# Altium PCB RP2350_DevBoard.PcbDoc (part 1 of 2)
Units mil, origin at the board's own origin, x right, y up, seen from the top; angles counter-clockwise.
Board outline 3000 x 3600 mil, 2 copper layers (Top Layer, Bottom Layer), stack 33.512 mil thick; 69 components, 85 nets, 318 pads, 96 vias.
Unrouted connection lines stored in the file: 43.
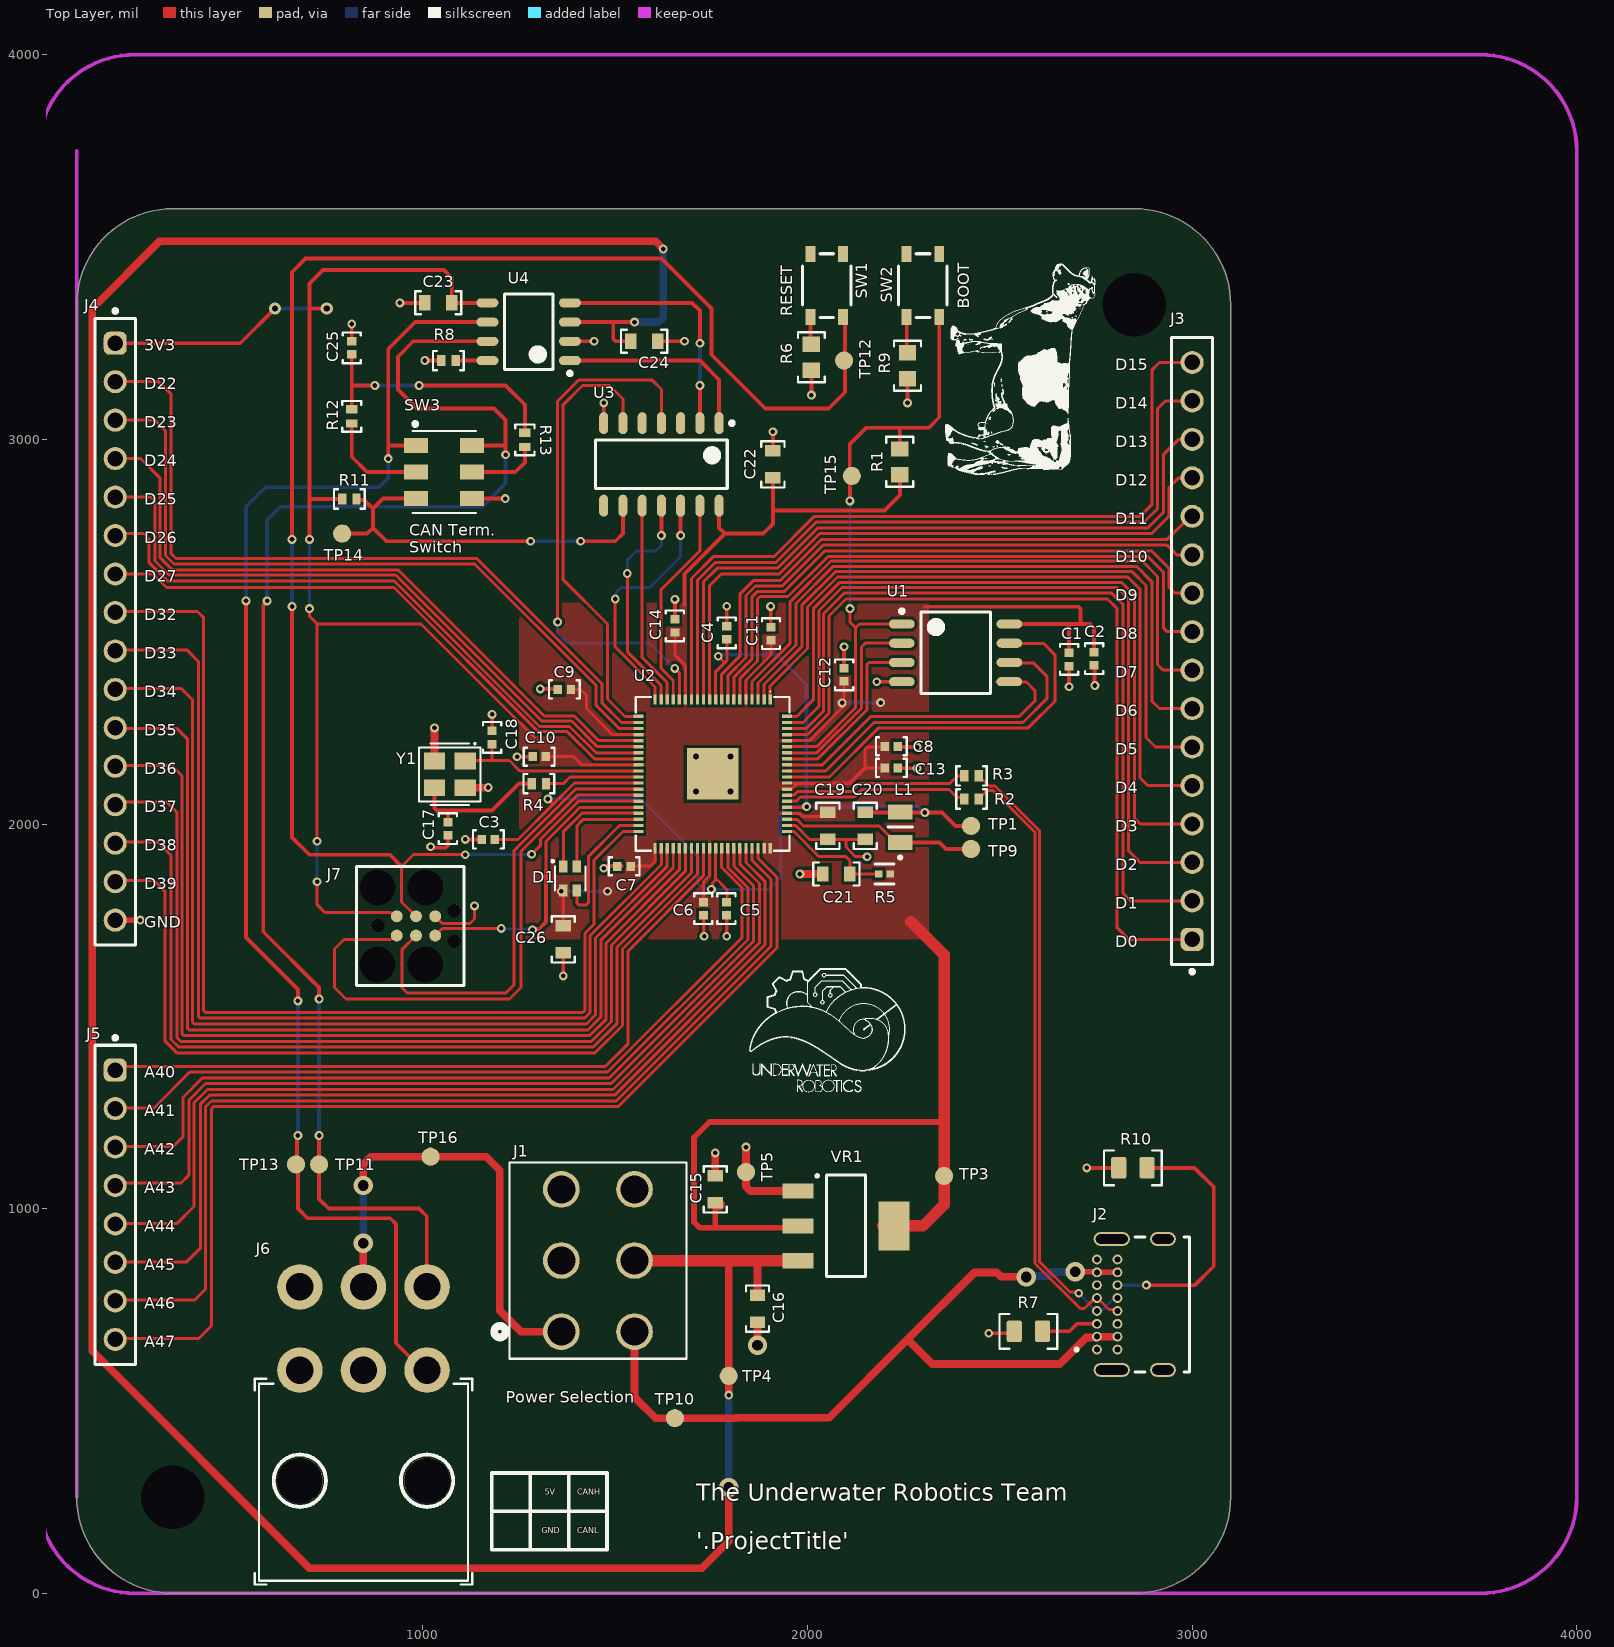
[diagram p0: Top Layer view]
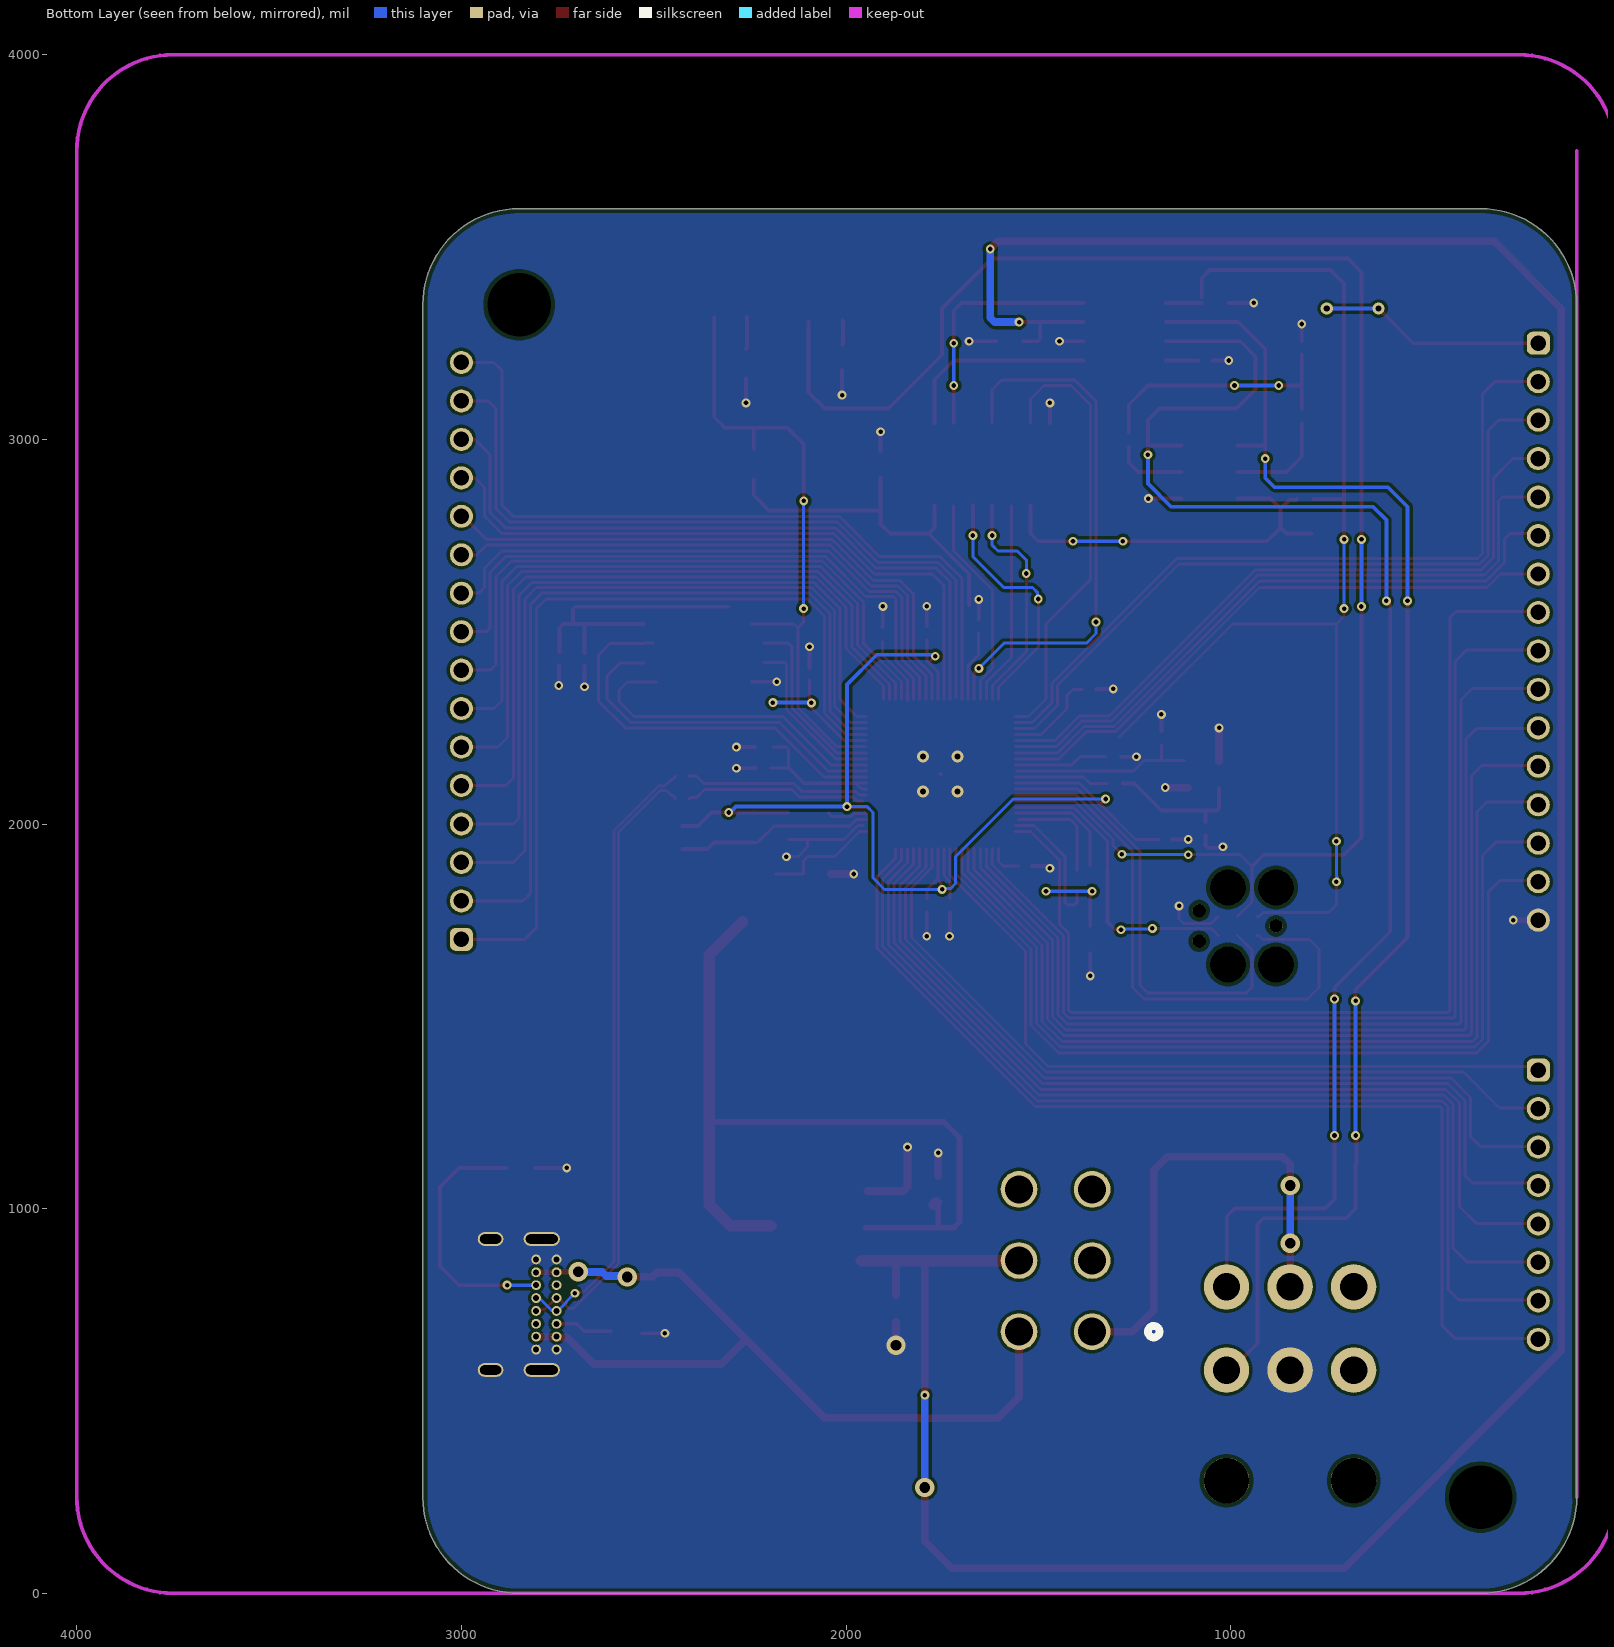
[diagram p1: Bottom Layer view, seen from below]
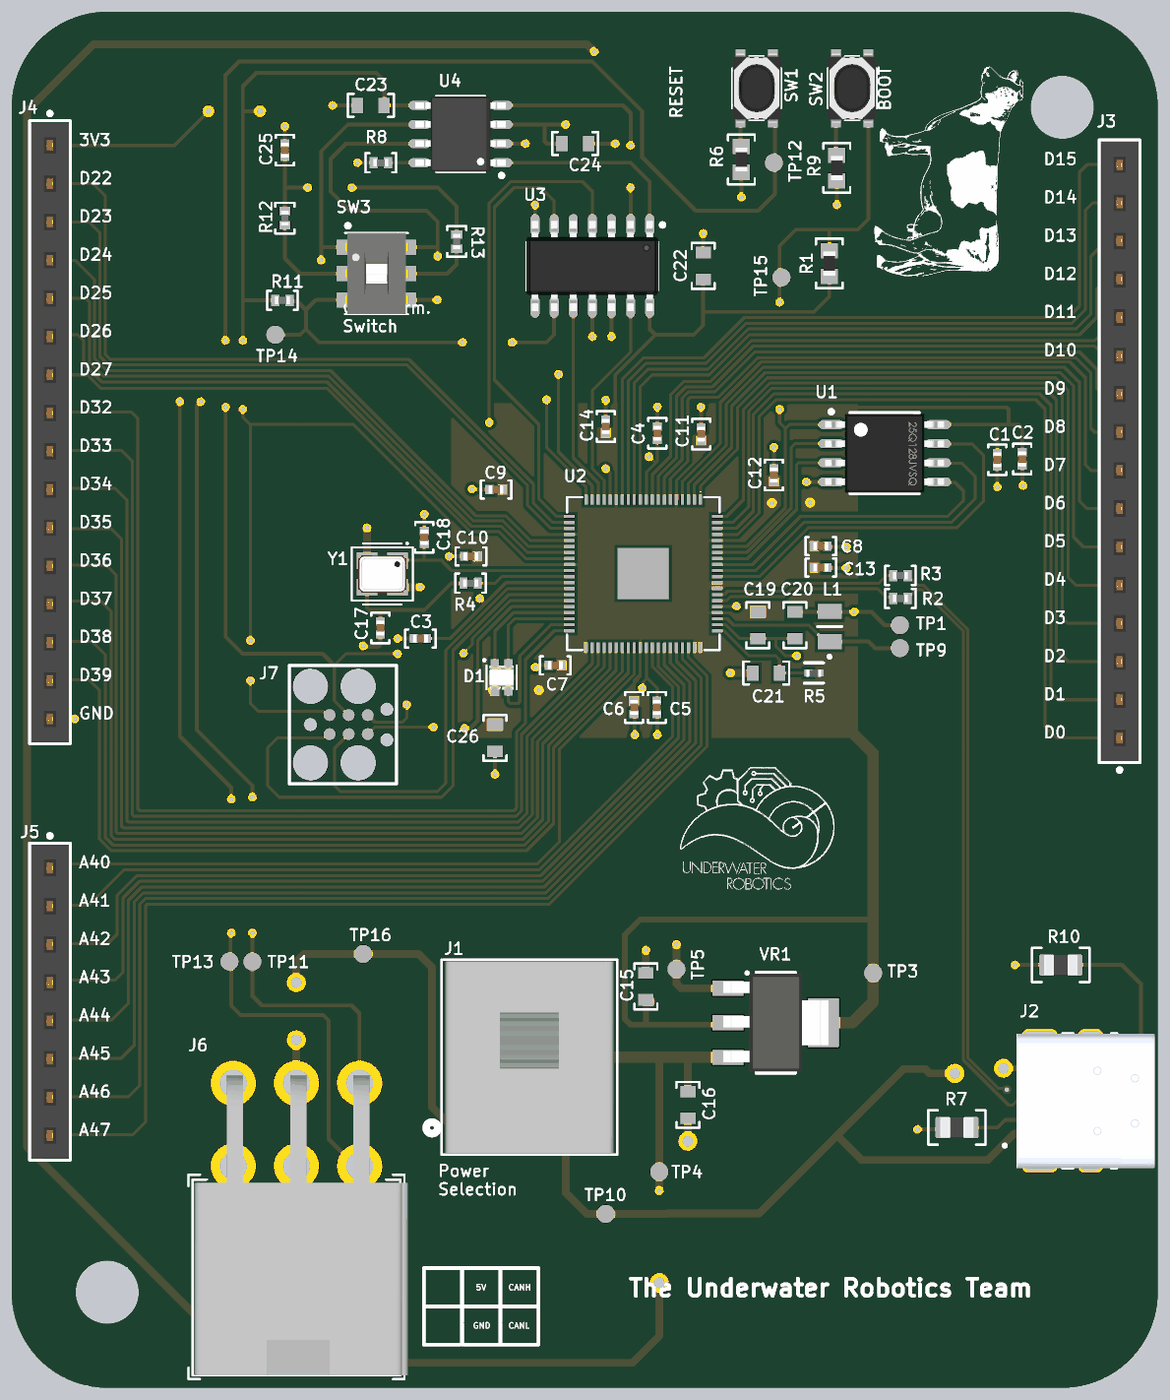
[diagram p2: 3D render of the assembled board from above, using the file's embedded part models]

## Layer stack, top to bottom
Top Solder: solder mask 1, SM-001, Dk 4
Top Layer: signal copper 2.7559
Dielectric 3: core 28, Core-039, Dk 4.8
Bottom Layer: signal copper 2.7559
Bottom Solder: solder mask 1, SM-001, Dk 4

## Board outline
350,3600 ccw(c350,3350) 100,3350 100,250 ccw(c350,250) 350,0 2850,0 ccw(c2850,250) 3100,250 3100,3350 ccw(c2850,3350) 2850,3600

## Design rules (kind name [scope] priority, off if disabled: settings)
AcuteAngle [All] p1: minimum=8.00000000000000E+0001 checktracksonly=FALSE
BoardOutlineClearance "BoardOutlineClearance JLCPCB" [All] p1: gap=11.81 ignorepadtopadclearanceinfootprint=FALSE
Clearance "Clearance JLCPCB 4 layer" [All] p1: gap=7.87 ignorepadtopadclearanceinfootprint=FALSE except(3.54: Arc-Arc Arc-Track Track-Track; 5: Arc-SMDPad Arc-Via Track-SMDPad Track-Via SMDPad-SMDPad; 9.45: THPad-THPad THPad-Via Via-Via; 10: Arc-Hole Track-Hole SMDPad-Hole THPad-Hole Via-Hole Fill-Hole Poly-Hole Region-Hole Text-Hole)
DiffPairsRouting "Diff Pairs USB 2.0" [InDifferentialPairClass('USB 2.0')] p1: maxlimit=5 minlimit=5 mostfreqgap=5 toplayer_minwidth=7.87 toplayer_maxwidth=7.87 toplayer_prefwidth=7.87 bottomlayer_minwidth=7.87 bottomlayer_maxwidth=7.87 bottomlayer_prefwidth=7.87 impedanceprofiledriven=TRUE impedanceprofileid={9C1C01C3-81FD-4AE1-9E3D-BC841176F5CA} maxuncoupledlength=500
DiffPairsRouting "Diff Pairs PCIe Gen 2" [InDifferentialPairClass('PCIe Gen 2')] p2: maxlimit=5 minlimit=5 mostfreqgap=5 toplayer_minwidth=5.53 toplayer_maxwidth=5.53 toplayer_prefwidth=5.53 bottomlayer_minwidth=5.53 bottomlayer_maxwidth=5.53 bottomlayer_prefwidth=5.53 impedanceprofiledriven=TRUE impedanceprofileid={D86E5A41-F98B-413D-93FD-A6E48D035561} maxuncoupledlength=500
HoleSize "HoleSize JLCPCB Pad" [IsPad] p1: absolutevalues=TRUE maxlimit=248.03 minlimit=19.68 maxpercent=80.000 minpercent=20.000
HoleSize "HoleSize JLCPCB 4 layer Cheap" [All] p2: absolutevalues=TRUE maxlimit=248.03 minlimit=11.81 maxpercent=80.000 minpercent=20.000
HoleToHoleClearance "HoleToHoleClearance JLCPCB Same Net" [All] p1: gap=10 allowstackedmicrovias=TRUE
MinimumAnnularRing "MinimumAnnularRing JLCPCB Via" [All] p1: minimumring=2.95
MinimumAnnularRing "MinimumAnnularRing JLCPCB Pad" [IsPad] p2: minimumring=9.84
MinimumAnnularRing "MinimumAnnularRing JLCPCB 1oz" [All] p3: minimumring=5.12
MinimumSolderMaskSliver "MinimumSolderMaskSliver JLCPCB" [All] p1: minsoldermaskwidth=3.94
PlaneClearance [All] p1: clearance=11.81
PlaneConnect [All] p1: planeconnectstyle=Direct reliefexpansion=20 reliefentries=4 reliefconductorwidth=10 reliefairgap=10
PolygonConnect [All] p1: connectstyle=Direct reliefconductorwidth=15 reliefentries=4 polygonreliefangle="45 Angle" airgapwidth=10
RoutingVias "RoutingVias JLCPCB 4 layer" [All] p1: holewidth=19.68 width=39.37 viastyle="Through Hole" minholewidth=11.81 minwidth=17.72 maxholewidth=50 maxwidth=80 useviatemplates=TRUE viatemplateguid#1={1FF1CE2E-D4DA-45DD-BA18-462DD51CCE8B} viatemplateguid#2={A26B80D9-3972-439C-BF20-AF114F6C39ED} viatemplateguid#3={94EF3918-7136-44E3-8D4D-2DFBB820EAE1} viatemplatename#1=v50h30m0mx0(Tol13-8) viatemplatename#2=v65h40m0mx0(Tol13-8) viatemplatename#3=v80h50m0mx0(Tol13-8)
SilkToSilkClearance [All] p1: silktosilkclearance=3
SilkToSolderMaskClearance "SilkToSolderMaskClearance JLCPCB" [IsPad] p1: minsilkscreentomaskgap=5.91 clearancetoexposedcopper=TRUE
SolderMaskExpansion "SolderMaskExpansion JLCPCB" [All] p1: expansion=1.5 istentingtop=FALSE
UnRoutedNet [All] p1: checkbadconnections=TRUE
Width "Width JLCPCB 4 layer" [All] p1: maxlimit=196.85 minlimit=3.54 preferedwidth=9.84 minimp=50.000000 maximp=50.000000 favimp=50.000000
21 further rules are at their usual default settings.

## Classes and differential pairs
component class Micro: C1 C2 C3 C4 C5 C6 C7 C8 C9 C10 C11 C12 C13 C14 C15 C16 C17 C18 C19 C20 C21 J1 L1 R1 R2 R3 R4 R5 TP1 TP3 TP4 TP5 TP9 U1 U2 VR1 Y1
component class Connectors: C22 C23 C24 C25 C26 D1 J2 J3 J4 J5 J6 J7 R6 R7 R8 R9 R10 R11 R12 R13 SW1 SW2 SW3 TP10 TP11 TP12 TP13 TP14 TP15 TP16 U3 U4
differential pair USB_D: +USB_D_P -USB_D_N

## Components (designator, comment, footprint, x,y, rotation, side; value= is the part's Value field where it differs from the comment)
C1 "100nF Ceramic 25V" CAPACITOR_0402 2680,2427.87 r270 top value=0.1uF
C2 "100nF Ceramic 25V" CAPACITOR_0402 2745,2430 r270 top value=0.1uF
C3 "100nF Ceramic 25V" CAPACITOR_0402 1170,1960 r180 top value=0.1uF
C4 "4700pF Ceramic 25V" CAPACITOR_0402 1790,2497.13 r90 top value=4.7nF
C5 "100nF Ceramic 25V" CAPACITOR_0402 1789,1779.87 r270 top value=0.1uF
C6 "100nF Ceramic 25V" CAPACITOR_0402 1729,1779.87 r270 top value=0.1uF
C7 "100nF Ceramic 25V" CAPACITOR_0402 1522.87,1890 r180 top value=0.1uF
C8 "100nF Ceramic 25V" CAPACITOR_0402 2217.87,2202 r0 top value=0.1uF
C9 "100nF Ceramic 25V" CAPACITOR_0402 1367.87,2350 r180 top value=0.1uF
C10 "100nF Ceramic 25V" CAPACITOR_0402 1302.13,2175 r180 top value=0.1uF
C11 "100nF Ceramic 25V" CAPACITOR_0402 1905,2495 r90 top value=0.1uF
C12 "100nF Ceramic 25V" CAPACITOR_0402 2095,2387.87 r90 top value=0.1uF
C13 "100nF Ceramic 25V" CAPACITOR_0402 2218,2146 r0 top value=0.1uF
C14 "100nF Ceramic 25V" CAPACITOR_0402 1655,2515 r90 top value=0.1uF
C15 "10uF Ceramic 6.3V" CAPACITOR_0603 1760,1050 r90 top
C16 "10uF Ceramic 6.3V" CAPACITOR_0603 1870,740 r270 top
C17 "15pF Ceramic 50V" CAPACITOR_0402 1065,1987.87 r270 top value=15pF
C18 "15pF Ceramic 50V" CAPACITOR_0402 1180,2225 r90 top value=15pF
C19 "4.7uF Ceramic 6.3V" CAPACITOR_0603 2053,1995 r270 top value=4.7uF
C20 "4.7uF Ceramic 6.3V" CAPACITOR_0603 2150,1995 r90 top value=4.7uF
C21 "4.7uF Ceramic 6.3V" CAPACITOR_0603 2075,1870 r180 top value=4.7uF
C22 "100nF Ceramic 25V" CAPACITOR_0603 1910,2935 r90 top value=0.1uF
C23 "100nF Ceramic 25V" CAPACITOR_0603 1040,3355 r180 top value=0.1uF
C24 "100nF Ceramic 25V" CAPACITOR_0603 1575,3255 r0 top value=0.1uF
C25 "4700pF Ceramic 25V" CAPACITOR_0402 815,3237.87 r90 top value=4.7nF
C26 "1uF Ceramic 16V" CAPACITOR_0603 1365,1700 r270 top value=1uF
D1 "EAST1616RGBB4" LED_0606_4SMD 1382.28,1858.5 r270 top
J1 "Slide Switch 6A 28V DPDT Through Hole" CONN_S3CQE2 1360,680 r0 top
J2 "USB-C TH" "USB-C TH" 2752.42,633.6 r90 top
J3 "61301611821" 61301611821 3000,2450 r90 top
J4 "61301611821" 61301611821 200,2500 r270 top
J5 "61300811821" 61300811821 200,1010 r270 top
J6 "Mini-Fit Jr R/A" "CONN_MOLEX_MINIFIT JR_6 POS_R/A" 680,292.6 r0 top
J7 "TagConnect SWD" TC2030-MCP 882,1735 r0 top
L1 "3.3 uH Shielded" INDUCTOR_0806 2241,1952.26 r90 top value="3.3 uH"
R1 "10k Ohm 0.5% 1/10W" RESISTOR_0603 2240,2941.5 r90 top
R2 "27 Ohm 1% 1/16W" RESISTOR_0402 2426.3,2065 r0 top
R3 "27 Ohm 1% 1/16W" RESISTOR_0402 2426.3,2125 r0 top
R4 "1k Ohm 1% 1/16W" RESISTOR_0402 1301.3,2105 r180 top
R5 "AC0402JR-0733RL" FP-AC0402-IPC_C 2199.9,1870 r180 top
R6 "1k Ohm 5% 1/8W" RESISTOR_0603 2010,3213.5 r270 top
R7 "5.1k Ohm 1% 1/8W" RESISTOR_0805 2574.19,681 r0 top
R8 "10k Ohm 1% 1/16W" RESISTOR_0402 1066.3,3205 r180 top
R9 "1k Ohm 5% 1/8W" RESISTOR_0603 2260,3191.5 r270 top
R10 "5.1k Ohm 1% 1/8W" RESISTOR_0805 2846,1106 r0 top
R11 "10k Ohm 1% 1/16W" RESISTOR_0402 808.7,2845 r0 top
R12 "60.4 Ohm 1% 1/16W" RESISTOR_0402 815,3060 r90 top
R13 "60.4 Ohm 1% 1/16W" RESISTOR_0402 1265,2998.7 r90 top
SW1 "434123025826" SMD_434123025826 2050,3400 r270 top
SW2 "434123025826" SMD_434123025826 2300,3400 r270 top
SW3 "Switch DPDT" CAS-220TA 1055,2915 r270 top
TP1 "PCB Test Point" TESTPOINT_1.2MM 2425,1995 r0 top
TP3 "PCB Test Point" TESTPOINT_1.2MM 2355,1085 r90 top
TP4 "PCB Test Point" TESTPOINT_1.2MM 1795,565 r0 top
TP5 "PCB Test Point" TESTPOINT_1.2MM 1840,1095 r0 top
TP9 "PCB Test Point" TESTPOINT_1.2MM 2425,1935 r0 top
TP10 "PCB Test Point" TESTPOINT_1.2MM 1655,455 r0 top
TP11 "PCB Test Point" TESTPOINT_1.2MM 730,1115 r0 top
TP12 "PCB Test Point" TESTPOINT_1.2MM 2095,3205 r0 top
TP13 "PCB Test Point" TESTPOINT_1.2MM 670,1115 r0 top
TP14 "PCB Test Point" TESTPOINT_1.2MM 790,2755 r0 top
TP15 "PCB Test Point" TESTPOINT_1.2MM 2115,2905 r0 top
TP16 "PCB Test Point" TESTPOINT_1.2MM 1020,1135 r0 top
U1 "W25Q128JVSIQ" "SOIC-8 W25QxJV" 2385,2445 r0 top
U2 "RP2350B" QFN-80 1902.82,2323.33 r270 top
U3 "MCP2517FD" SOIC-14 1620,2935 r270 top
U4 "CAN Transceiver" SOIC-8 1275,3280 r180 top
VR1 "LM1117IMPX-3.3/NOPB" SOT-223-4 2100,955 r0 top
Y1 "CRYSTAL 10PF SMD" "4-SMD, NO LEAD CRYSTAL 3.2x2.5mm" 1110,2164 r180 top value="12 MHz"

## Footprints (in the part's own frame and the unit in brackets; to place one, negate y for a bottom-side part, rotate by r counter-clockwise, add the part's x,y. Pads: shape width x height; smd on the part's side, far side on the other; paste and mask are expansions set on the pad)
"4-SMD, NO LEAD CRYSTAL 3.2x2.5mm" [mm]
  rrect0% 1.4x1.1 smd: 1(0,0) 2(2.032,0) 3(2.032,1.778) 4(0,1.778)
  silkscreen extent -1.02,-1.2 3.05,2.92, body extent -0.58,-0.36 2.62,2.14, height 0.82
61300811821 [mm] "Socket Header, Pitch 2.54 mm, THT, Vertical, single row, 8p"
  rrect50% 1.52x1.52 hole 1.02: 1(-8.89,0)
  round 1.52 hole 1.02: 2(-6.35,0) 3(-3.81,0) 4(-1.27,0) 5(1.27,0) 6(3.81,0) 7(6.35,0) 8(8.89,0)
  silkscreen extent -11.14,-1.35 10.54,1.35, body extent -10.41,-1.25 10.41,1.25, height 8.55
61301611821 [mm] "Socket Header, Pitch 2.54 mm, THT, Vertical, single row, 16p"
  rrect50% 1.52x1.52 hole 1.02: 1(-19.05,0)
  round 1.52 hole 1.02: 2(-16.51,0) 3(-13.97,0) 4(-11.43,0) 5(-8.89,0) 6(-6.35,0) 7(-3.81,0) 8(-1.27,0) 9(1.27,0) 10(3.81,0) 11(6.35,0) 12(8.89,0) 13(11.43,0) 14(13.97,0) 15(16.51,0) 16(19.05,0)
  silkscreen extent -21.3,-1.35 20.7,1.35, body extent -20.57,-1.25 20.57,1.25, height 8.55
CAPACITOR_0402 [mm]
  rect 0.56x0.6 smd: 1(-0.435,0) 2(0.435,0)
  silkscreen extent -1.02,-0.6 1.02,0.6, body extent -0.5,-0.28 0.5,0.27, height 0.51
CAPACITOR_0603 [mil] "CAPACITOR 0603"
  rect 30x40 smd: 1(-35,0) 2(35,0)
  silkscreen extent -60,-30 60,30, body extent -31,-16 32,16, height 31
CAS-220TA [mm] "SWITCH SLIDE DPDT 100MA 6V"
  rrect0% 1x1.6 smd: 1(-1.75,-1.85) 2(0,-1.85) 3(1.75,-1.85) 4(-1.75,1.85) 5(0,1.85) 6(1.75,1.85)
  silkscreen extent -3.3,-2.1 2.7,2.1, body extent -2.7,-2.1 2.7,2.1, height 2.51
"CONN_MOLEX_MINIFIT JR_6 POS_R/A" [mm] "Molex Minifit Jr 5569 6 Pos R/A"
  round 3 hole 1.801: 1(8.4,7.3) 4(8.4,12.8)
  round 3 hole 1.8: 2(4.2,7.3) 3(0,7.3) 5(4.2,12.8) 6(0,12.8)
  round 3 hole 3 unplated mask+0: ""(0,0) ""(8.4,0)
  silkscreen extent -2.98,-6.86 11.38,6.73, body extent -2.58,-6.6 11.62,13.33, height 11.4
CONN_S3CQE2 [mm]
  round 2.424 hole 1.85 mask+0: 1(4.83,0) 2(4.83,4.7) 3(4.83,9.4) 4(0,0) 5(0,4.7) 6(0,9.4)
  silkscreen extent -4.44,-1.78 8.26,11.18, body extent -3.29,-1.65 8.12,11.05, height 11.2
FP-AC0402-IPC_C [mil]
  rect 20.29x18.6 smd paste+0 mask+0: 1(-14.9,0) 2(14.9,0)
  silkscreen extent -25,-27 25,27, body extent -29,-15 29,15, height 10
INDUCTOR_0806 [mm]
  rect 1x1.6 smd: 1(0,0) 2(2,0)
  silkscreen extent -1.1,-0.8 1,0.8
LED_0606_4SMD [mm]
  rrect0% 0.8x0.55 smd: 1(-0.8,-0.45) 2(-0.8,0.45) 3(0.8,0.45) 4(0.8,-0.45)
  silkscreen extent -1.22,-1.22 0.8,1.02, body extent -0.8,-0.8 0.8,0.8, height 0.35
QFN-80 [mm]
  rect 0.665x0.22 smd: 1(0,0) 2(0,-0.4) 3(0,-0.8) 4(0,-1.2) 5(0,-1.6) 6(0,-2) 7(0,-2.4) 8(0,-2.8) 9(0,-3.2) 10(0,-3.6) 11(0,-4) 12(0,-4.4) 13(0,-4.8) 14(0,-5.2) 15(0,-5.6) 16(0,-6) 17(0,-6.4) 18(0,-6.8) 19(0,-7.2) 20(0,-7.6) 41(9.815,-7.6) 42(9.815,-7.2) 43(9.815,-6.8) 44(9.815,-6.4) 45(9.815,-6) 46(9.815,-5.6) 47(9.815,-5.2) 48(9.815,-4.8) 49(9.815,-4.4) 50(9.815,-4) 51(9.815,-3.6) 52(9.815,-3.2) 53(9.815,-2.8) 54(9.815,-2.4) 55(9.815,-2) 56(9.815,-1.6) 57(9.815,-1.2) 58(9.815,-0.8) 59(9.815,-0.4) 60(9.815,0)
  rect 0.22x0.665 smd: 21(1.107,-8.708) 22(1.507,-8.708) 23(1.908,-8.708) 24(2.308,-8.708) 25(2.708,-8.708) 26(3.107,-8.708) 27(3.507,-8.708) 28(3.908,-8.708) 29(4.308,-8.708) 30(4.708,-8.708) 31(5.107,-8.708) 32(5.507,-8.708) 33(5.908,-8.708) 34(6.308,-8.708) 35(6.708,-8.708) 36(7.107,-8.708) 37(7.507,-8.708) 38(7.908,-8.708) 39(8.308,-8.708) 40(8.708,-8.708) 61(8.708,1.107) 62(8.308,1.107) 63(7.908,1.107) 64(7.507,1.107) 65(7.107,1.107) 66(6.708,1.107) 67(6.308,1.107) 68(5.908,1.107) 69(5.507,1.107) 70(5.107,1.107) 71(4.708,1.107) 72(4.308,1.107) 73(3.908,1.107) 74(3.507,1.107) 75(3.107,1.107) 76(2.708,1.107) 77(2.308,1.107) 78(1.908,1.107) 79(1.507,1.107) 80(1.107,1.107)
  rect 3.4x3.4 smd: 81(4.908,-3.8)
  silkscreen extent -0.56,-8.88 9.98,1.28
RESISTOR_0402 [mm] "Resistor 0402"
  rect 0.55x0.75 smd: 1(-0.475,0) 2(0.475,0)
  silkscreen extent -1.02,-0.64 1.02,0.64, body extent -0.5,-0.25 0.5,0.25, height 0.25
RESISTOR_0603 [mil] "Resistor 0603"
  rect 40x45 smd: 1(-33.5,0) 2(33.5,0)
  silkscreen extent -65,-35 65,35, body extent -31,-16 32,16, height 16
RESISTOR_0805 [mm]
  rrect25% 1x1.42 smd: 1(-0.935,0) 2(0.935,0)
  silkscreen extent -1.91,-1.14 1.91,1.14, body extent -1.11,-0.67 1.1,0.67, height 0.61
SMD_434123025826 [mm]
  rect 1.05x0.65 smd: A1(-2.075,1.075) A2(2.075,1.075) B1(-2.075,-1.075) B2(2.075,-1.075)
  silkscreen extent -2.1,-1.6 2.1,1.6, body extent -2.3,-1.6 2.3,1.6, height 2.5
SOIC-8 [mm] "SOIC, 8-Leads, Body 4.90x3.90mm, Pitch 1.27mm, IPC Medium Density"
  oval 1.45x0.6 smd: 1(-2.725,1.905) 2(-2.725,0.635) 3(-2.725,-0.635) 4(-2.725,-1.905) 5(2.725,-1.905) 6(2.725,-0.635) 7(2.725,0.635) 8(2.725,1.905)
  silkscreen extent -2.85,-2.5 1.6,2.88, body extent -3,-2.5 3,2.5, height 1.75
"SOIC-8 W25QxJV" [mm] "SOIC, 8-Leads, Body 5.28x5.28mm, Pitch 1.27mm, IPC Medium Density"
  oval 1.7x0.6 smd: 1(-3.55,1.905) 2(-3.55,0.635) 3(-3.55,-0.635) 4(-3.55,-1.905) 5(3.55,-1.905) 6(3.55,-0.635) 7(3.55,0.635) 8(3.55,1.905)
  silkscreen extent -3.67,-2.7 2.3,2.88, body extent -3.95,-2.62 3.95,2.62, height 1.95
SOIC-14 [mm] "SOIC, 14-Leads, Body 8.65x3.90mm, Pitch 1.27mm, IPC Medium Density"
  oval 1.45x0.6 smd: 1(-2.725,3.81) 2(-2.725,2.54) 3(-2.725,1.27) 4(-2.725,0) 5(-2.725,-1.27) 6(-2.725,-2.54) 7(-2.725,-3.81) 8(2.725,-3.81) 9(2.725,-2.54) 10(2.725,-1.27) 11(2.725,0) 12(2.725,1.27) 13(2.725,2.54) 14(2.725,3.81)
  silkscreen extent -2.85,-4.35 1.6,4.79, body extent -3,-4.4 3,4.4, height 1.7
SOT-223-4 [mm]
  rect 2.05x1 smd paste+0 mask+0.102: 1(-3.175,2.3) 2(-3.175,0) 3(-3.175,-2.3)
  rect 2.05x3.25 smd paste+0 mask+0.102: 4(3.175,0)
  silkscreen extent -1.96,-3.35 1.3,3.35, body extent -3.5,-3.25 3.5,3.25, height 1.68
TC2030-MCP [mil]
  round 31 smd: 1(50,-25) 2(50,25) 3(100,-25) 4(100,25) 5(150,-25) 6(150,25)
  round 34 hole 35 unplated: A(0,0) B(200,40) C(200,-40)
  round 92 hole 93 unplated: D(0,-100) E(125,-100) F(0,100) G(125,100)
  silkscreen extent -55,-155 225,155
TESTPOINT_1.2MM [mm]
  round 1.2 smd: TP(0,0)
"USB-C TH" [mm]
  round 0.65 hole 0.4: A1(0,0) A4(0.85,0) A5(1.7,0) A6(2.55,0) A7(3.4,0) A8(4.25,0) A9(5.1,0) A12(5.95,0) B1(5.95,-1.35) B4(5.1,-1.35) B5(4.25,-1.35) B6(3.4,-1.35) B7(2.55,-1.35) B8(1.7,-1.35) B9(0.85,-1.35) B12(0,-1.35)
  oval 0.9x1.7 hole 0.6 slot 1.4 at 90 deg: S1(-1.35,-4.36) S2(7.3,-4.36)
  oval 0.9x2.4 hole 0.6 slot 2.1 at 90 deg: S3(-1.35,-0.98) S4(7.3,-0.98)
  silkscreen extent -1.5,-6.1 7.45,1.44, body extent -1.5,-8.61 7.45,0.56, height 3.46

## Part data
C1 C2 C3 C5 C6 C7 C8 C9 C10 C11 C12 C13 C14: library part CAPACITOR_0.1uF_0402, "Cap 100nF 25V +/-10% / Ceramic 0402", Supplier Part Number 1=7029569, Tolerance="+/- 10%", Voltage=25V, Made By="Robert Pafford", Supplier 1="Future Electronics"
C4 C25: library part CAPACITOR_0.0047uF_0402, "4700 pF +/-10% 25V Ceramic Capacitor X7R 0402", Supplier Part Number 1=1909415, Tolerance="+/- 10%", Voltage=25V, Made By="Robert Pafford", Supplier 1="Future Electronics"
C15 C16: library part CAPACITOR_10uF_0603, "Cap 10uF 6.3V +/-20% / Ceramic 0603", Supplier Part Number 1=1276-1119-1-ND, Tolerance="+/- 20%", Value (uF)="10 uF", Voltage=6.3V, ComponentLink1Description=Digikey, ComponentLink1URL=https://www.digikey.com/en/products/detail/samsung-electro-mechanics/CL10A106MQ8NNNC/3886777, Made By="Flip B", Supplier 1=Digi-Key
C17 C18: library part CAPACITOR_0.000015uF_0402, "CAP CER 15PF 50V C0G/NP0 0402", Supplier Part Number 1=82AC9245, Tolerance="+/- 5%", Voltage=50V, Made By="Robert Pafford", Supplier 1=Newark
C19 C20 C21: library part CAPACITOR_4.7uF_0603, "Cap 4.7uF 6.3V +/-10% / Ceramic 0603", Supplier Part Number 1=1276-2087-1-ND, Tolerance="+/- 10%", Voltage=6.3V, Made By="Robert Pafford", Supplier 1=Digi-Key
C22 C23 C24: library part CAPACITOR_0.1uF_0603_25V, "Cap 100nF 25V +/-10% / Ceramic 0603", Supplier Part Number 1=1276-1006-1-ND, Tolerance="+/- 10%", Voltage=6.3V, ComponentLink1Description=Datsheet, ComponentLink1URL=https://www.mouser.com/datasheet/2/212/KEM_C1002_X7R_SMD-1102033.pdf, Made By="Flip B", Supplier 1=Digikey
C26: library part CAPACITOR_1uF_0603, "Cap 1uF 16V +/-10% / Ceramic 0603", Supplier Part Number 1=C1608X7R1C105K080AC, Tolerance="+/- 10%", Voltage=16V, Made By="Flip B", Supplier 1="Arrow Electronics"
D1: library part LED_RGB_4SMD, "LED RGB CLEAR 4SMD", Blue Forward Current=5mA, Blue Forward Voltage=2.8V, Color=RGB, Package=4-SMD, Red Forward Voltage=1.8V, Supplier Part Number 1=1080-1552-1-ND, ComponentLink1Description=Datasheet, ComponentLink1URL=https://everlightamericas.com/index.php?controller=attachment&id_attachment=3220, Green Forward Current=5mA, Green Forward Voltage=2.8V, Made By="Robert Pafford", Red Forward Current=5mA, Supplier 1=Digi-Key
J1: library part "Slide DPDT Switch", "SWITCH SLIDE DPDT 6A 28V Through Hole", Manufacturer_Part_Number=1201M2S3CQE2, Mfr_Name=C&K, Supplier Part Number 1=36AH1005, Copyright="Copyright (C) 2022 Ultra Librarian. All rights reserved.", RefDes=RefDes, Supplier 1=Newark, Type=DEV
J2: library part CONN_USBC_USB4085-GF-A, "USB-C (USB TYPE-C) USB 2.0 Receptacle Connector 24 (16+8 Dummy) Position Through Hole, Right Angle", Supplier Part Number 1=2073-USB4085-GF-ADKR-ND, Created By="John Ulm", Interface=USB-C, Supplier 1=DigiKey, Type="Through Hole"
J3 J4: library part CMP-1502-01343-3, Contact Resistance=20mΩ, Current Rating=3A, Operating Supply Voltage=250V, Contact Material=Copper, Gender=Female, Lead Free="Lead Free", Lead Pitch=2.54mm, NexarPartId=23389750, Number of Pins=16, Orientation=Vertical, RoHS=Compliant
J5: library part CMP-1502-01327-3, Contact Resistance=20mΩ, Current Rating=3A, Operating Supply Voltage=250V, Gender=Female, Lead Pitch=2.54mm, NexarPartId=61924723, Number of Pins=8, Orientation=Vertical, RoHS=Non-Compliant
J6: library part "CONN_MOLEX_MINIFIT JR_6POS_R/A", "Molex Minifit Jr. 5569  / 6 Pos R/A Natural", Color=Natural, Current Per Pin=13A, Manufacturer=Molex, Supplier Part Number 1=WM1353-ND, ComponentLink1Description=Datasheet, ComponentLink1URL=https://www.molex.com/pdm_docs/ps/PS-5556-001.pdf, Configuration="Right Angle", Created By="Flip B", Number of Positions=8, Pitch=4.2mm, Series="Minifit Jr 5569", Supplier 1=Digi-Key
J7: library part TC2030_SWD, "TagConnect TC2030 ARM SWD 6-pin"
L1: library part INDUCTOR_3.3uH_0806, "3.3 µH Shielded Molded Inductor 2.1 A 140mOhm Max 0806 (2016 Metric)", Manufacturer="Abracon LLC", Supplier Part Number 1=535-AOTA-B201610S3R3-101-TDKR-ND, Created By="John Ulm", Supplier 1=DigiKey
R1: library part RESISTOR_10K_0.5%_0603, "RES 10k OHM 0.5% 1/10W 0603", Digikey Part Numer=CR0603-JW-104ELFTR-ND, Supplier Part Number 1=749-1695-1-ND, Tolerance="+/- 0.5%", Value  (Ohms)=10K, Made By="Robert Pafford", Supplier=Digikey, Supplier 1=Digi-Key, Wattage=1/10W
R2 R3: library part RESISTOR_27_0402, "RES 27 OHM 1% 1/16W 0402", Digikey Part Numer=CR0603-JW-104ELFTR-ND, Supplier Part Number 1=YAG5278DKR-ND, Tolerance="+/- 1%", Value  (Ohms)=27, Made By="Robert Pafford", Supplier=Digikey, Supplier 1=Digi-Key, Wattage=1/16W
R4: library part RESISTOR_1K_0402, "RES 1k OHM 1% 1/16W 0402", Digikey Part Numer=CR0603-JW-104ELFTR-ND, Supplier Part Number 1=13-AC0402FR-131KLCT-ND, Tolerance="+/- 1%", Value  (Ohms)=1K, Made By="Robert Pafford", Supplier=Digikey, Supplier 1=Digi-Key, Wattage=1/16W
R5: library part CMP-03412-045460-1, "RES 33Ω ±5% 0.063W 0402", Case Code (Imperial)=0402, Case Code (Metric)=1005, Max Operating Temperature=155°C, Max Power Dissipation=63mW, Min Operating Temperature=-55°C, Power Rating=62.5mW, Resistance=33R, Resistor Type="Thick Film", Temperature Coefficient=100ppm/°C, Tolerance=5%, Voltage Rating=50V, Case/Package=0402, Features="Moisture Resistant", Height=0.015inch, Lead Free="Lead Free", Length=0.039inch, Number of Terminations=2, Packaging="Tape and Reel", RoHS Compliant=Yes, Series=AC, Size Code=0402, Termination=SMD/SMT, Weight=2.3E-05oz, Width=0.5mm
R6 R9: library part RESISTOR_1K_0603, "RES 1k OHM 5% 1/8W 0603", Digikey Part Numer=CR0603-JW-104ELFTR-ND, Supplier Part Number 1=2019-RK73B1JTTD102JCT-ND, Tolerance="+/- 5%", Value  (Ohms)=1K, ComponentLink1Description=Datasheet, ComponentLink1URL=https://www.bourns.com/docs/product-datasheets/CRxxxxx.pdf, Made By="Robert Pafford", Supplier=Digikey, Supplier 1=Digi-Key, Wattage=1/8W
R7 R10: library part RESISTOR_5.1K_0805, "RES 5.1k OHM 1% 1/8W 0805", Digikey Part Numer=CR0603-JW-104ELFTR-ND, Supplier Part Number 1=53W4863, Tolerance="+/- 5%", Value  (Ohms)=5.1K, ComponentLink1Description=Datasheet, ComponentLink1URL=https://www.bourns.com/docs/product-datasheets/CRxxxxx.pdf, Made By="Dylan Trainor", Supplier=Digikey, Supplier 1=Newark, Wattage=1/8W
R8 R11: library part RESISTOR_10K_0402, "RES 10k OHM 1% 1/16W 0402", Digikey Part Numer=CR0603-JW-104ELFTR-ND, Supplier Part Number 1=YAG3436CT-ND, Tolerance="+/- 1%", Value  (Ohms)=10K, Made By="Robert Pafford", Supplier=Digikey, Supplier 1=Digi-Key, Wattage=1/16W
R12 R13: library part RESISTOR_60.4_0402, "RES 60.4 OHM 1% 1/16W 0402", Digikey Part Numer=CR0603-JW-104ELFTR-ND, Supplier Part Number 1=13-AC0402FR-0760R4LCT-ND, Tolerance="+/- 1%", Value  (Ohms)=60.4, Made By="Robert Pafford", Supplier=Digikey, Supplier 1=Digi-Key, Wattage=1/16W
SW1 SW2: library part "Tactile Switch SMD", "WS-TASV J-Bend SMT Tact Switch, SPST-NO, 16VDC, 50mA, 260g", Manufacturer="Wurth Elektronik", Operating Temperature Max=85°C, Operating Temperature Min=-40°C, Rated Current=50mA, Rated Voltage=16VDC, Supplier Part Number 1=710-434123025826, Category="Tact Switches", Circuit=SPST-NO, ComponentLink1Description="Website Link", ComponentLink1URL=https://www.we-online.com/redexpert/article/434123025826?ad, ComponentLink2Description="Datasheet Link", ComponentLink2URL=https://www.we-online.com/redexpert/spec/434123025826?ad, Contact Material="Stainless Steel", Contact Plating=Silver, Height=2.5mm, Length=4.2mm, Manufacturer Part Number=434123025826, Match Code=WS-TASV, Mount="Surface Mount", Operation Force=260g, Packaging="Tape and Reel", Supplier 1=Mouser, Terminal Material="Copper Alloy", Terminal Plating=Silver, Washable=No, Width=3.2mm
SW3: library part CAS-220TA_CAN_TERM, "GOLD SWITCH FLUSH SLIDE DPDT 100MA 6V", Current Rating="100 mA", Supplier Part Number 1=CAS220JCT-ND, Voltage Rating=6VDC, Contact Finish=Gold, Made By="Robert Pafford", Supplier 1=Digi-Key, Switch Function=DPDT
TP1 TP3 TP4 TP5 TP9 TP10 TP11 TP12 TP13 TP14 TP15 TP16: library part TESTPOINT, Made By="Robert Pafford"
U1: "IC FLASH 128MBIT SPI/QUAD 8SOIC", Supplier Part Number 1=W25Q128JVSIQ-ND, Made By="Robert Pafford", Size=128M, Supplier 1=Digi-Key
U2: library part RP2350B_C42415655, JLCPCB Part Class="Extended Part", LCSC Part Name=微控制器, Manufacturer="Raspberry Pi(树莓派)", Add into BOM=yes, Convert to PCB=yes, Datasheet=https://item.szlcsc.com/datasheet/RP2350B/44413055.html, Device=RP2350B_C42415655, Manufacturer Part=RP2350B, Supplier=LCSC, Supplier Footprint=QFN-80-EP(10x10), Supplier Part=C42415655, Symbol=RP2350B_C42415655
U3: "CANbus Controller CAN 2.0 SPI Interface 14-SOIC", Made By="Robert Pafford", Max FD Rate="8 Mbps"
U4: library part TJA1442AT, "CAN Interface IC High-Speed CAN Transceiver with Standby Mode", Supplier Part Number 1=771-TJA1442AT/0Z, Made By="Robert Pafford", Max Data Rate=5Mbps, Supplier 1=Mouser
VR1: "800-mA 15-V linear voltage regulator 4-SOT-223 -40 to 125", Package="SOT-223-4 Texas Instruments", Arrow_Electronics-Purchase-URL=https://snapeda.com/shop?store=Arrow+Electronics&id=410186, Availability=Good, DigiKey-Purchase-URL=https://snapeda.com/shop?store=DigiKey&id=410186, MF="Texas Instruments", Mouser-Purchase-URL=https://snapeda.com/shop?store=Mouser&id=410186, MP=LM1117IMPX-3.3/NOPB, Price=None, SnapEDA_Link=https://www.snapeda.com/parts/LM1117IMPX-3.3/NOPB/Texas%20Instruments/view-part/410186/?ref=snap, Texas_Instruments-Purchase-URL=https://snapeda.com/shop?store=Texas+Instruments&id=410186
Y1: library part CRYSTAL_12MHz_RP2350, "12 MHz ±30ppm Crystal 10pF 50 Ohms 4-SMD, No Lead", Supplier Part Number 1=535-ABM8-272-T3CT-ND, Created By="John Ulm", Supplier 1=DigiKey

## Free pads (board coordinates)
  round 60 hole 165 unplated: 1(350,250) 1(2850,3350)

## Via types
v1: diameter 23, hole 12, Top Layer to Bottom Layer, 83 vias
v2: diameter 50, hole 28, Top Layer to Bottom Layer, 6 vias
v3: diameter 31.5, hole 15.75, Top Layer to Bottom Layer, 6 vias
v4: diameter 23, hole 12, Top Layer to Bottom Layer, tented both sides, 1 vias

## Nets (pads, with @x,y where several pads share a name; then routed paths per layer and width w, separated by ;. In a path a pad name is that pad's centre, name@x,y a point inside that pad or via, vN(x,y) a via of type N, cw(c..) or ccw(c..) an arc to the next point about the centre after c; other vN are vias at no path point)
+5V: C16.1 C24.1 J1.2 TP4.TP U4.3 VR1.3 | length 7949.6
  Top Layer w10: U4.3 1495,3305 ; C24.1 1500.86,3255 1495,3260.86 1495,3305 ; J1.2@1547.64,867.56 J1.2 ; v1(1550,3305) 1495,3305
  Top Layer w20: v1(1625,3495) 1605,3515 315,3515 140,3340 140,630 705,65 1725,65 1795,135 v2(1795,275) ; v1(1795,515) 1795,870 ; C16.1 1870,865
  Top Layer w30: J1.2 VR1.3@1960,865.04
  Bottom Layer w20: v1(1550,3305) 1613.28,3305 1625,3316.72 v1(1625,3495) ; v2(1795,275) v1(1795,515)
+5VSL: J1.4 J6.5 TP16.TP | length 1249.2
  Top Layer w20: J6.5@844.65,786.54 844.65,894.65 845,895 v2(845,910) ; v2(845,1060) 845,1115 865,1135 1165,1135 1200,1100 1200,735 1255,680 J1.4@1355,680
  Bottom Layer w20: v2(845,910) v2(845,1060)
+VUSB: J1.1 J2.A4 J2.A9 J2.B4 J2.B9 TP10.TP | length 2202.1
  Top Layer w15: v2(2696,836) 2747.52,836 J2.A9@2747.52,832.36 ; J2.A9 2799.39,834.39 J2.B4@2801,836
  Top Layer w20: J1.1@1550.16,675.16 1550.16,509.84 1605,455 TP10.TP 1814,455 ; 1814,456 2056,456 2260,660 ; v2(2568.63,822.51) 2503,822.51 2491.51,834 2434,834 2260,660 ; J2.A4 2750.21,664.86 2724.86,664.86 2656,596 2324,596 2260,660 ; J2.A4@2757.06,667.06 J2.B9
  Bottom Layer w20: v2(2568.63,822.51) 2571.13,825 2623.63,825 2633.63,835 2695,835 v2(2696,836)
ADC_AVDD: C1.1 C2.1 C6.1 C7.1 C8.1 C9.1 C10.1 C11.1 C12.1 C13.1 C14.1 C15.1 C19.1 C22.1 C23.1 C26.1 D1.4 J4.1 J7.2 R1.1 R5.1 R11.1 TP3.TP U1.8 U2.5 U2.15 U2.24 U2.29 U2.41 U2.50 U2.59 U2.60 U2.64 U2.68 U2.69 U2.76 U3.14 U4.5 VR1.2 VR1.4 | length 9852.2
  Top Layer w7.78: v1(705,2560) 705,2540 725,2520 ; v1(725,1850) 725,1790 745,1770 915.83,1770 925.83,1760 J7.2 ; v1(725,1955) 725,2520 ; 1290,2225 995,2520 725,2520 ; C10.1@1325,2175 1391.49,2175 1412.75,2153.74 U2.29 ; C9.1 1410,2350 1425,2335 1425,2300 1492.52,2232.48 U2.24 ; C7.1@1550.25,1891 1592,1891 1603.6,1902.6 U2.41 ; C14.1 1655,2440 1682.34,2412.66 U2.15 ; C6.1@1730,1805 1729.61,1805.39 1729.61,1850.06 1745.34,1865.79 U2.50 ; 1840,2336.6 1840,2374.38 1905,2439.38 C11.1@1905,2474.37 ; U2.64 1978.28,2027.76 1986.04,2020 2036.89,2020 2045,2028.11 C19.1@2045,2030 ; U2.68 1959.51,2090.75 1974.88,2106.12 1974.5,2106.5 U2.69 ; U2.76 2004.28,2216.73 v1@2095,2307.45 ; v1@2095,2315 C12.1 C12.1@2095,2375.33 ; C8.1@2190,2200 2155,2200 2149,2194 2149,2146 C13.1@2196,2146
  Top Layer w9.84: J4.1@205,3250 525,3250 v3(615,3340)
  Top Layer w10: v1(705,2740) 705,2845 ; v3(750,3340) 705,3340 ; R11.1@785,2845 705,2845 ; C23.1 U4.5 ; C23.1@1075,3370 1075,3420 1054.56,3440.44 740,3440.44 740,3440 705,3405 705,3340 ; v1(1360,1825) 1361.81,1826.81 D1.4@1364.76,1826.81 ; D1.4 D1.4@1364.76,1826.81 ; C26.1 1365,1826.57 D1.4@1364.76,1826.81 ; D1.4@1365,1826.81 D1.4@1364.76,1826.81 ; 1680,2569.24 1680,2650 1785,2755 ; U3.14 1770,2770 1785,2755 ; U2.5 1839.82,2336.42 1840,2336.6 ; C22.1 1910,2815 ; 1974.88,2106.12 2109.12,2106.12 2149,2146 ; R1.1@2240,2895.81 2240,2855 2200,2815 1910,2815 ; 2305,2565 2704.14,2565 2710,2559.14 2710,2520 ; U1.8@2526.23,2520 2710,2520 ; C1.1 2680,2515 ; C2.1 2745,2510 2735,2520 2710,2520 ; 705,2845 705,3340 ; 1785,2755 1885,2755 1910,2780 1910,2815
  Top Layer w15: 1760,950 C15.1 ; VR1.2@1950,950 1720,950 1705,965 1705,1185 1745,1225 2360,1225
  Top Layer w20: J4.1@180,3250 J4.1@185,3255
  Top Layer w30: C15.1@1765,1015 C15.1@1770,1010 ; VR1.4@2195,955 VR1.4 2300,955 2355,1010 TP3.TP 2355,1660 2268.6,1746.4
  Bottom Layer w7.78: v1(705,2560) v1(705,2740) ; v1(725,1850) 725,1855 723.22,1856.78 723.22,1863.22 725,1865 v1(725,1955)
  Bottom Layer w9.84: v3(615,3340) v3(750,3340) ; v1(2090,2315) 2090.75,2315.75 v1(2190,2315.75)
  Bottom Layer w10: v1(1360,1825) v1(1480,1825)
CAN_CS: U2.17 U3.13 | length 559
  Top Layer w7.78: U2.17 1650.85,2373.09 1619.47,2404.47 1619.47,2609.47 1720,2710 U3.13
CAN_INT: U2.16 U3.4 | length 1424.1
  Top Layer w7.78: v1(1350.1,2525.1) 1350,2525.2 1350,3099.05 1405.95,3155 1595,3155 1620,3130 U3.4 ; v1@1654.43,2404.57 v1(1654.57,2404.57) 1655.14,2404 1655.64,2404 1666.6,2393.04 U2.16
  Bottom Layer w7.78: v1(1350.1,2525.1) 1350,2525 1350,2495 1375,2470 1589.14,2470 v1(1654.57,2404.57)
CAN_OSC: U2.21 U3.6 | length 1165.3
  Top Layer w7.78: U3.6 1520,3105 1485,3140 1415,3140 1363.78,3088.78 1363.78,2636.22 1480,2520 1480,2325 1525.27,2279.73 U2.21
CAN_SCK: U2.18 U3.10 | length 531.4
  Top Layer w7.78: U3.10 1570,2432.88 1635.1,2367.78 U2.18
CAN_SDI: U2.19 U3.11 | length 606.9
  Top Layer w7.78: v1(1531.32,2651.32) 1531.32,2448.17 1619.35,2360.14 U2.19
  Top Layer w10: v1(1620,2750) U3.11
  Bottom Layer w7.78: v1(1531.32,2651.32) 1531.32,2686.32 1555,2710 1605,2710 1620,2725 v1(1620,2750)
CAN_SDO: U2.20 U3.12 | length 661.6
  Top Layer w7.78: v1(1500,2585) 1500,2460 1603.6,2356.4 U2.20
  Top Layer w10: v1(1670,2750) U3.12
  Bottom Layer w7.78: v1(1500,2585) 1502.72,2587.72 1502.72,2602.72 1515,2615 1590,2615 1670,2695 v1(1670,2750)
CAN_TERM_DET: R11.2 SW3.3 TP14.TP U3.9 | length 1057.6
  Top Layer w10: TP14.TP 855,2755 870,2770 ; R11.2 829.77,2842.63 847.37,2842.63 870,2820 ; SW3.3 896.1,2846.1 870,2820 ; v1(1280,2735) 905,2735 870,2770 ; v1(1409.89,2735) 1500,2735 1520,2755 U3.9 ; 870,2770 870,2820
  Bottom Layer w10: v1(1280,2735) v1(1409.89,2735)
CANH: J6.4 SW3.4 TP11.TP U4.7 | length 3875.7
  Top Layer w9.84: v1(730,1190) 730,1025 755,1000 990,1000 1010,980 J6.4@1010,786.54
  Top Layer w10: v1(595,2580) 595,2578.14 585,2568.14 585,1720 730,1575 v1(730,1545) ; SW3.4 1213.9,2983.9 1215,2985 ; U4.7 975,3255 935,3215 935,3130 985,3080 1185,3080 1215,3050 v1(1215,2960)
  Bottom Layer w10: v1(595,2580) 595,2790 630,2825 1155,2825 1215,2885 v1(1215,2960) ; v1(730,1190) v1@730,1540
CANL: J6.1 SW3.1 TP13.TP U4.6 | length 3672.5
  Top Layer w9.84: v1(675,1190) 672.67,1187.67 672.67,1117.33 675,1115 675,1000 700,975 915,975 930,960 930,650 J6.1@1010,570
  Top Layer w10: v1(540,2580) 540,1705 675,1570 v1(675,1540) ; v1(910,2950) 910,2983.9 ; SW3.1 910,2983.9 ; U4.6 980,3305 910,3235 910,2983.9
  Bottom Layer w10: v1(540,2580) 540,2825 590.57,2875.57 885.57,2875.57 910,2900 v1(910,2950) ; v1(675,1190) v1(675,1540)
CANRX: U3.2 U4.4 | length 638.7
  Top Layer w10: U4.4 1700,3355 1720,3335 v1(1720,3250) ; U3.2 v1(1720,3140)
  Bottom Layer w10: v1(1720,3140) v1(1720,3250)
CANTX: U3.1 U4.1 | length 521.1
  Top Layer w10: U4.1 1720,3205 1770,3155 U3.1
DBG_TX_RP2350: J7.5 U2.36 | length 792.1
  Top Layer w7.78: J7.5 1050.5,1728.5 v1(1203.5,1728.5) ; 1320,1880 1320,1955 1408.51,2043.51 U2.36
  Top Layer w10: v1(1285,1725) 1286.24,1726.24 1301.24,1726.24 1320,1745 1320,1880
  Bottom Layer w7.78: v1(1203.5,1728.5) 1205.25,1726.75 1283.25,1726.75 v1(1285,1725)
GPIO0: J3.1 U2.77 | length 2205.6
  Top Layer w7.87: U2.77 2000.47,2232.48 2056.06,2288.07 2056.06,2541.06 2100,2585 2780,2585 2805,2560 2805,1730 2835,1700 J3.1@3005,1700
GPIO1: J3.2 U2.78 | length 2119.3
  Top Layer w7.78: U2.78 1994.77,2248.23
  Top Layer w7.87: 1996.6,2248.23 2041.37,2293 2041.37,2546.37 2095,2600 2791.15,2600 2820,2571.15 2820,1820 2840,1800 2995,1800 J3.2@3000,1795
GPIO2: J3.3 U2.79 | length 2031
  Top Layer w7.78: U2.79 1959.51,2263.98 ; 1959.53,2264 1988,2264 2030,2306 2030,2555 2089.64,2614.64 2804.64,2614.64 2835,2584.28 2835,1930 2865,1900 J3.3 J3.3@3005,1895
GPIO3: J3.4 U2.80 | length 1933.8
  Top Layer w7.87: U2.80 1971.73,2279.73 2015,2323 2015,2559.56 2083.91,2628.47 2816.53,2628.47 2850,2595 2850,2015 2865,2000 2990,2000 J3.4@2995,1995
GPIO4: J3.5 U2.1 | length 1832.3
  Top Layer w7.78: U2.1 1902.82,2359.05 2000,2456.23 2000,2564.11 2078.18,2642.3 2832.54,2642.3 2865,2609.84 2865,2119.56 2884.56,2100 J3.5 J3.5@3005,2095
GPIO5: J3.6 U2.2 | length 1769.4
  Top Layer w7.78: U2.2 1887.07,2362.8 1985,2460.73 1985,2568.61 2072.47,2656.08 2843.92,2656.08 2880,2620 2880,2225 2905,2200 3005,2200 J3.6@3010,2195
GPIO6: J3.7 U2.3 | length 1699.7
  Top Layer w7.78: U2.3 1871.32,2366.72 1970,2465.4 1970,2573.1 2066.76,2669.86 2855.14,2669.86 2895,2630 2895,2320 2915,2300 2990,2300 J3.7@3000,2290
GPIO7: J3.8 U2.4 | length 1632.9
  Top Layer w7.78: U2.4 1855.57,2370.46 1955,2469.89 1955,2577.59 2061.05,2683.65 2869.98,2683.65 2910,2643.62 2910,2415 2925,2400 2990,2400 J3.8@2995,2395
GPIO8: J3.9 U2.6 | length 1612
  Top Layer w7.78: U2.6 1824.08,2377.96 1870,2423.88 1870,2585 1876.22,2591.22 1949.13,2591.22 2052.91,2695 2885,2695 2925,2655 2925,2510 2935,2500 J3.9@2990,2500
GPIO9: J3.10 U2.7 | length 1560.3
  Top Layer w7.78: U2.7 1808.33,2381.7 1855,2428.37 1855,2589.49 1870.51,2605 1940,2605 2045,2710 2895,2710 2940,2665 2940,2615 2955,2600 J3.10@3005,2600
GPIO10: J3.11 U2.8 | length 1505.2
  Top Layer w7.78: U2.8 1792.58,2385.44 1840,2432.86 1840,2593.99 1864.8,2618.78 1934.29,2618.78 2040.51,2725 2935,2725 2955,2705 2955,2704.56 2959.56,2700 J3.11@2990,2700
GPIO11: J3.12 U2.9 | length 1549.1
  Top Layer w7.78: U2.9 1776.83,2389.19 1825,2437.36 1825,2598.48 1859.09,2632.57 1928.58,2632.57 2035.16,2739.15 2934.15,2739.15 2985.04,2790.04 2985.95,2790.04 2995,2799.09 J3.12@2995,2800
GPIO12: J3.13 U2.11 | length 1696
  Top Layer w7.78: U2.11 1745.34,2619.66 1775.68,2650 1926.52,2650 2031.52,2755 2895,2755 2940,2800 2940,2875 2965,2900 J3.13@2985,2900
GPIO13: J3.14 U2.12 | length 1808
  Top Layer w7.87: U2.12 1729.59,2629.59 1765,2665 1921.96,2665 2026.96,2770 2885,2770 2925,2810 2925,2960 2965,3000 J3.14@2990,3000
GPIO14: J3.15 U2.13 | length 1941
  Top Layer w7.87: U2.13@1713.84,2329.35 1713.84,2633.84 1760,2680 1917.34,2680 2022.34,2785 2875,2785 2910,2820 2910,3080 2930,3100 J3.15@3005,3100
GPIO15: J3.16 U2.14 | length 2079.4
  Top Layer w7.78: U2.14 1698.09,2638.09 1755,2695 1912.78,2695 2017.78,2800 2865,2800 2895,2830 2895,3180 2915,3200 2985,3200 J3.16@3025,3200
GPIO22: J4.2 U2.22 | length 2019.4
  Top Layer w7.78: J4.2@180,3150 313.23,3150 344.58,3118.65 344.58,2703.67 358.25,2690 1140,2690 1465,2365 1465,2315 1516.02,2263.98 U2.22
GPIO23: J4.3 U2.23 | length 1933.4
  Top Layer w7.78: J4.3@180,3050 303.23,3050 330.8,3022.43 330.8,2697.96 352.54,2676.22 1135,2676.22 ; 1134.29,2676.22 1450,2360.51 1450,2308.42 1510.19,2248.23 U2.23
GPIO24: J4.4 U2.25 | length 1804.7
  Top Layer w7.78: J4.4@180,2950 265.8,2950 317.02,2898.78 317.02,2692.25 348.23,2661.03 935,2661.03 1314.69,2281.35 1392.64,2281.35 1457.26,2216.73 U2.25
GPIO25: J4.5 U2.26 | length 1740.3
  Top Layer w7.78: J4.5@180,2850 293.23,2850 303.23,2840 303.23,2683.85 339.84,2647.25 929.3,2647.25 1308.98,2267.57 1386.93,2267.57 1453.5,2200.99 U2.26
GPIO26: J4.6 U2.27 | length 1652.8
  Top Layer w7.78: J4.6@180,2750 185,2755 273.23,2755 288.23,2740 288.23,2679.36 336.37,2631.22 925,2631.22 ; 925.84,2631.22 1303.27,2253.78 1381.22,2253.78 1449.76,2185.24 U2.27
GPIO27: J4.7 U2.28 | length 1579.4
  Top Layer w7.78: J4.7@180,2650 298.1,2650 333.1,2615 925,2615 ; 924.66,2615 1299.66,2240 1375.51,2240 1446.02,2169.49 U2.28
GPIO32: J4.8 U2.40 | length 2791.4
  Top Layer w7.87: J4.8@206.17,2552.72 413.83,2552.72 430,2536.55 430,1697.12 ; 430,1695 430,1514.61 434.61,1510 1415.44,1510 1421.17,1515.73 1421.17,1715.73 1445,1739.56 1445,1905.38 1520.13,1980.51 U2.40
GPIO33: J4.9 U2.42 | length 2701.3
  Top Layer w7.78: J4.9@181.17,2452.72 386.17,2452.72 416.17,2422.72 416.17,1499.56 420.73,1495 1420,1495 1435,1510 1435,1710 1620,1895 1620,1919.03 1619.77,1919.26 1619.77,1923.4 1619.35,1923.82 U2.42
GPIO34: J4.10 U2.43 | length 2632.3
  Top Layer w7.78: J4.10@191.17,2357.72 196.17,2352.72 371.17,2352.72 401.17,2322.72 401.17,1484.56 405.73,1480 1425,1480 1448.78,1503.78 1448.78,1703.78 1635.1,1890.1 U2.43
GPIO35: J4.11 U2.44 | length 2576.6
  Top Layer w7.78: J4.11@181.17,2247.72 361.17,2247.72 387.39,2221.5 387.39,1469.56 391.95,1465 1429.49,1465 1462.57,1498.07 1462.57,1698.07 1650.85,1886.36 U2.44
GPIO36: J4.12 U2.45 | length 2512.1
  Top Layer w7.78: J4.12@191.17,2157.72 196.17,2152.72 346.17,2152.72 373.6,2125.29 373.6,1454.56 378.16,1450 1433.99,1450 1476.35,1492.36 1476.35,1690.8 1666.6,1881.05 U2.45
GPIO37: J4.13 U2.46 | length 2451.5
  Top Layer w7.78: J4.13@191.17,2057.72 333.47,2057.72 360,2031.18 360,1445 370,1435 1438.48,1435 1490.14,1486.66 1490.14,1685.09 1681.96,1876.91 ; 1681.96,1876.96 1682.34,1877.34 U2.46
GPIO38: J4.14 U2.47 | length 2379.6
  Top Layer w7.78: J4.14@191.17,1962.72 201.17,1952.72 310.9,1952.72 345,1918.62 345,1440 365,1420 1442.97,1420 1505,1482.03 1505,1680.46 1698.09,1873.55 U2.47
GPIO39: J4.15 U2.48 | length 2308.9
  Top Layer w7.78: J4.15@196.17,1857.72 201.17,1852.72 301.17,1852.72 330,1823.89 330,1435 360,1405 1447.47,1405 1518.78,1476.32 1518.78,1674.75 1713.84,1869.81 U2.48
GPIO40: J5.1 U2.49 | length 1958.4
  Top Layer w7.78: J5.1@196.22,1362.84 196.22,1366.03 J5.1@205.19,1375 ; J5.1@205.19,1370 1475,1370 1533.57,1428.57 1533.57,1670.04 1730,1866.47 1730,1923.41 1729.59,1923.82 U2.49
GPIO41: J5.2 U2.52 | length 2083.4
  Top Layer w7.78: J5.2@186.22,1266.81 191.22,1261.81 300.81,1261.81 394,1355 1480,1355 1830,1705 1830,1833.47 1776.83,1886.64 U2.52
GPIO42: J5.3 U2.53 | length 2197.3
  Top Layer w7.78: J5.3@191.22,1166.81 196.22,1161.81 351.22,1161.81 376.22,1186.81 376.22,1289.08 427.14,1340 1485,1340 1845,1700 1845,1834.49 1792.58,1886.91 U2.53
GPIO43: J5.4 U2.54 | length 2320.9
  Top Layer w7.78: J5.4@176.22,1066.81 371.22,1066.81 391.22,1086.81 391.22,1281.22 435,1325 1489.49,1325 1860,1695.51 1860,1838.99 1808.33,1890.66 U2.54
GPIO44: J5.5 U2.55 | length 2415.6
  Top Layer w7.78: J5.5@186.22,961.81 361.22,961.81 405,1005.59 405,1275 440,1310 1493.99,1310 1875,1691.01 1875,1845.05 1824.08,1895.97 U2.55
GPIO45: J5.6 U2.56 | length 2538
  Top Layer w7.78: J5.6@186.22,866.81 191.22,861.81 386.22,861.81 421.22,896.81 421.22,1271.22 445,1295 1498.48,1295 1890,1686.52 1890,1850 1839.82,1900.18 U2.56
GPIO46: J5.7 U2.57 | length 2643.2
  Top Layer w7.78: J5.7@196.22,761.81 406.22,761.81 435,790.59 435,1265 450,1280 1502.97,1280 1905,1682.03 1905,1856.06 1855.57,1905.49 U2.57
GPIO47: J5.8 U2.58 | length 2769.9
  Top Layer w7.78: J5.8@181.22,661.81 416.22,661.81 450,695.59 450,1260.44 454.56,1265 1507.47,1265 1920,1677.53 1920,1862.12 1871.32,1910.8 U2.58
LEDB: D1.3 U2.39 | length 349.8
  Top Layer w7.87: D1.3 1400,1795 1405,1790 1425,1790 1430,1795 1430,1915 1511.26,1996.26 U2.39
LEDG: D1.2 U2.38 | length 274.2
  Top Layer w7.87: D1.2@1400,1879.77 1400,1995 1417,2012 U2.38@1551.91,2012
LEDR: D1.1 U2.37 | length 303.6
  Top Layer w7.87: D1.1@1365,1890.81 1365,1979.62 1413.38,2028 U2.37@1559.73,2028
NetC17_1: C17.1 R4.2 Y1.3 | length 364.6
  Top Layer w9.84: Y1.3 1030,2040.77 1035.77,2035 1065,2035 ; C17.1 1065,2035 ; R4.2@1280,2105 1250,2105 1180,2035 1065,2035
NetC25_1: C25.1 R12.2 R13.2 | length 685.4
  Top Layer w10: R12.2 815,3140 ; C25.1 815,3140 ; v1(875,3140) 815,3140 ; v1(990,3140) 1215,3140 1265,3090 R13.2
  Bottom Layer w10: v1(875,3140) v1(990,3140)
NetJ2_A5: J2.A5 R7.2 | length 148.3
  Top Layer w9.84: R7.2 2681,681 2700.53,700.53 2750.53,700.53 J2.A5@2751,701
NetJ2_B5: J2.B5 R10.2 | length 665.7
  Top Layer w9.84: v1(2881,801) 3007,801 3056,850
  Top Layer w10: R10.2 3006,1106 3056,1056 3056,850
  Bottom Layer w9.84: J2.B5 2805.61,800.96 2875.96,800.96 v1@2876,801
NetJ7_1: J7.1 U2.34 | length 1505.8
  Top Layer w7.78: J7.1 926.32,1710 916.32,1700 795,1700 770,1675 770,1575 800,1545 1225,1545 1255,1575 1255,1928.99 1401.01,2075 U2.34
NetJ7_3: J7.3 U2.33 | length 1195.5
  Top Layer w7.78: J7.3 945,1673 945,1575 960,1560 1215,1560 1236.22,1581.22 1236.22,1929.7 1397.27,2090.75 U2.33
NetJ7_4: J7.4 SW1.A2 TP12.TP U2.35 | length 4506.7
  Top Layer w7.78: J7.4 944.5,1797.5 944.5,1889.5 975.5,1920.5 1109.5,1920.5 v1(1110,1920) ; v1@1285,1925 1286.22,1925 1306.22,1945 1306.22,1960.71 1404.76,2059.25 U2.35
  Top Layer w10: v1(659.55,2740) 659.55,3434.55 695,3470 1510,3470 1620,3470 1750,3340 1750,3220 1890,3080 2055,3080 2097.64,3122.64 SW1.A2@2097.64,3305 ; v1(659.9,2565.64) 659.9,1965.1 705,1920 914,1920 944.5,1889.5
  Bottom Layer w7.78: v1(1110,1920) 1110.7,1920.7 1281.91,1920.7 v1(1282.61,1921.39)
  Bottom Layer w10: v1(659.55,2740) 659.55,2658.09 659.9,2657.74 v1(659.9,2565.64)
NetR2_1: R2.1 U2.66 | length 474.5
  Top Layer w7.78: U2.66@1956.16,2059.42 1970.58,2059.42 1981.16,2070 2121.16,2070 2141.16,2090 2367.93,2090 2389.66,2068.28 2404.32,2068.28 R2.1
NetR3_1: R3.1 U2.67 | length 481.9
  Top Layer w7.78: U2.67 1946.84,2075.42 1965.42,2075.42 1974,2084 2114,2084 2135,2105 2370,2105 2389.66,2124.66 2407.25,2124.66 R3.1
NetR6_1: R6.1 SW1.B2 | length 64.9
  Top Layer w9.84: R6.1 2007.68,3249.32 2007.68,3307.68 SW1.B2@2010,3310
NetR8_1: R8.1 U4.8 | length 82.7
  Top Layer w10: R8.1 U4.8
NetR9_1: R9.1 SW2.B2 | length 84.3
  Top Layer w9.84: SW2.B2 2257.68,3237.32 R9.1@2260,3235
NetR12_1: R12.1 SW3.2 | length 270
  Top Layer w10: R12.1 815,2955 855,2915 SW3.2
NetR13_1: R13.1 SW3.5 | length 187.5
  Top Layer w10: SW3.5 1240,2915 1265,2940 R13.1
QSPI_SCLK: U1.6 U2.71 | length 923.2
  Top Layer w7.87: U2.71 2046.99,2137.99 2173,2264 2560,2264 2622,2326 2622,2384 2587,2419 U1.6@2524.76,2419
QSPI_SD0: U1.5 U2.72 | length 848.3
  Top Layer w7.78: U2.72 2038.74,2153.74 2165,2280 2551,2280 2590,2319 ; U1.5@2491.76,2369 2569,2369 2590.78,2347.22 2590.78,2319
QSPI_SD1: U1.2 U2.74 | length 479.6
  Top Layer w7.78: U2.74 2024.19,2185.24 2140,2301.05 2140,2460 2150,2470 U1.2@2215,2470
QSPI_SD2: U1.3 U2.73 | length 441.1
  Top Layer w7.78: U2.73 2026.49,2169.49 2155,2298 2155,2415.44 2159.56,2420 U1.3@2215,2420
QSPI_SD3: U1.7 U2.70 | length 1054.9
  Top Layer w7.78: U2.70 2057.25,2122.25 2185,2250 2574,2250 2644,2320 2644,2439 2614,2469 U1.7@2524.76,2469 ; U1.7@2500,2470 U1.7
QSPI_SS: R1.2 SW2.A2 TP15.TP U1.1 U2.75 | length 1614.2
  Top Layer w7.78: U2.75 2023.92,2200.99 2125,2302.07 2125,2510 ; v1(2110.33,2560.06) 2110,2559.73 2110,2525 2125,2510 ; U1.1 2135,2520 2125,2510
  Top Layer w9.84: 2110,2875 2110,2905 2110,2987.84 2152.16,3030 2240,3030 ; R1.2 2240,3030 ; SW2.A2 2342.32,3057.32 2315,3030 2240,3030
  Top Layer w10: v1(2110,2840) 2110,2875
  Bottom Layer w7.87: v1(2110,2840) 2110.16,2839.84 2110.16,2560.23 v1(2110.33,2560.06)
USB_D_N: J2.A7 J2.B7 R2.2 | length 1617
  Top Layer w7.75: R2.2 2445,2068.94 2451.95,2075.89 2455.89,2075.89 2467.58,2087.58 2482.41,2087.58 2591.46,1978.53 2591.46,857.58 2709.03,740 2720,740 2740.42,760.42 2740.55,760.42 J2.A7@2750,769.87 ; J2.A7 2753.66,767.46 2783.71,737.41 2802.59,737.41 J2.B7@2810,730
USB_D_P: J2.A6 J2.B6 R3.2 | length 1610.2
  Top Layer w7.75: R3.2 2445,2121.06 2451.95,2114.11 2455.89,2114.11 2471.13,2098.87 2487.08,2098.87 2602.75,1983.21 2602.75,862.25 2682.08,782.92 2702.08,782.92 v4(2705,780)
  Bottom Layer w7.87: v4(2705,780) 2726.75,758.25 2726.75,756.82 2749.58,733.99 J2.A6 2755.4,736.98 2766.98,736.98 2794.47,764.47 2804.47,764.47 J2.B6@2806,766
VREG_AVDD: C21.1 R5.2 U2.61 | length 304.9
  Top Layer w7.78: U2.61 1946.57,1980.36 1964.64,1980.36 2030,1915 2100,1915 2110,1905 C21.1 R5.2
VREG_FB: C3.1 C4.1 C5.1 C20.2 L1.2 TP1.TP U2.10 U2.32 U2.51 U2.65 | length 3048.3
  Top Layer w7.78: C3.1@1185,1960 1247.38,1960 1338.69,2051.31 ; v1(1325,2065) 1338.69,2051.31 ; U2.32 1393.88,2106.5 1338.69,2051.31 ; v1(1750,1830) 1752.91,1832.91 1752.91,1846.76 1761.08,1854.93 1761.08,1858.92 ; U2.51 1761.08,1858.92 ; U2.10 1761.08,2395.85 1784.62,2419.38 1790,2424.77 C4.1 ; v1(1768,2436) 1784,2420 ; C5.1@1790,1805 1790,1830 1763.08,1856.92 1761.08,1858.92 ; U2.65 1984.53,2043.51
  Top Layer w10: U2.65 U2.65@1946.51,2043.42 ; 1984.62,2043.42 1995.8,2043.42 v1(1997.49,2045.11) ; C20.2 2240,2030 L1.2 2242,2030 v1(2305,2030) 2350,2030 2385,1995 TP1.TP
  Bottom Layer w7.78: v1(1325,2065) 1565,2065 1715,1915 1715,1845 1727.09,1832.91 1747.09,1832.91 v1(1750,1830) 1900,1830 1930,1860 1930,2030 1945,2045 1955,2045 ; 1955.11,2045.11 v1@1994.89,2045.11
  Bottom Layer w10: v1@1775,2440 1920,2440 1997.49,2362.51 v1(1997.49,2045.11) ; v1@1997.7,2045.32 2286.43,2045.32 2301.75,2030 v1(2305,2030)
VREG_LX: L1.1 TP9.TP U2.63 | length 510.5
  Top Layer w7.78: U2.63 1972.48,2012.01 1989.49,1995 2186.45,1995 2229.19,1952.26 L1.1
  Top Layer w10: L1.1 2342.74,1952.26 2360,1935 TP9.TP
VREG_PGND: C1.2 C2.2 C3.2 C4.2 C5.2 C6.2 C7.2 C8.2 C9.2 C10.2 C11.2 C12.2 C13.2 C14.2 C15.2 C16.2 C17.2 C18.2 C19.2 C20.1 C21.2 C22.2 C23.2 C24.2 C25.2 C26.2 J2.A1 J2.A12 J2.B1 J2.B12 J2.S1 J2.S2 J2.S3 J2.S4 J4.16 J6.2 J7.6 R6.2 R7.1 R8.2 R9.2 R10.1 SW3.6 TP5.TP U1.4 U2.62 U2.81 U3.7 U4.2 VR1.1 Y1.2 Y1.4 | length 2768.9
  Top Layer w7.78: J7.6 1050.5,1741.5 1122.5,1741.5 1134,1753 v1(1134,1787) ; U2.62@1954.51,1996.26 1954.93,1995.84 1969.16,1995.84 2005,1960 C19.2 2100,1960 ; C20.1 2100,1960 ; v1(2155,1915) 2125,1915 2100,1940 2100,1960
  Top Layer w9.84: v1(1110,1960) C3.2 ; C18.2 v1@1180,2280 ; v1@2260,3100 R9.2
  Top Layer w10: C25.2 v1(815,3300) ; v1(940,3355) C23.2 ; v1(1005,3205) R8.2 ; v1(1020,1940.89) 1022.49,1938.4 1046.01,1938.4 1046.14,1938.27 1059.14,1938.27 1065,1944.12 C17.2 ; SW3.6 v1(1213.9,2846.1) ; v1(1245,2175) C10.2 ; v1(1305,2351.24) 1305.62,2350.62 1350.13,2350.62 C9.2 ; v1(1365,1605) C26.2 ; U4.2 v1(1445,3255) ; v1(1470,1885) 1473.25,1885 1479.25,1891 C7.2@1516,1891 ; U3.7 v1(1470,3095) ; C24.2 v1(1680,3255) ; C14.2 v1(1655,2584.13) ; C6.2@1730,1770.75 1730,1709 v1(1731,1708) ; U2.81 U2.81@1754.88,2130.12 ; v1(1790,1708) C5.2@1790,1770.75 ; C4.2 v1(1790,2566.25) v1@1792,2566.25 ; v1(1904,2565.87) 1904.5,2565.37 1904.5,2512.63 C11.2 ; C22.2 v1(1910,3020) ; v1(2010,3115) R6.2 ; C12.2 v1(2095,2460.75) ; v1(2180,2370) U1.4 ; C13.2 2246.15,2146 2247.15,2145 v1(2285,2145) ; C8.2@2235.78,2200 v1(2285,2200) ; v1(2471,676) R7.1@2530.11,676 ; v1(2680,2357) C1.2 ; v1(2726,1106) R10.1 ; C2.2 2746,2411.87 2746,2361.13 v1(2747,2360.13)
  Top Layer w15: J4.16@180,1750 v1@260,1750
  Top Layer w20: Y1.2 v1(1030,2250) ; Y1.4 1168.46,2094 1169.46,2095 v1(1170,2095) ; C15.2 v1(1760,1145) ; v1(1840,1160) TP5.TP 1840,1057.27 1851.72,1045.55 VR1.1@1945,1045.55 ; v2(1870,645) C16.2 ; v1(1980,1870) C21.2
  other v1: 265,1750 1180,2285 2260,3095
  other v3: 1710,2085 1800,2085 1710,2175 1800,2175
XIN: C18.1 U2.30 Y1.1 | length 487.3
  Top Layer w7.87: Y1.1@1120,2165 1180,2165 ; C18.1@1180,2205 1180,2165 ; U2.30@1556.16,2138 1252,2138 1225,2165 1180,2165
XOUT: R4.1 U2.31 | length 247.1
  Top Layer w7.87: R4.1 1365,2105 1382.25,2122.25 U2.31
pads on no net: J1.3 J1.5 J1.6 J2.A8 J2.B8 J6. J6.3 J6.6 J7.A J7.B J7.C J7.D J7.E J7.F J7.G SW1.A1 SW1.B1 SW2.A1 SW2.B1 U3.3 U3.5 U3.8

## Polygon pours and split planes (outlines as drawn)
VREG_PGND on Bottom Layer "VREG_PGND_L02_P000" (solid, pour order 0): -17.93,3986.99 -17.93,-13.01 3932.07,-13.01 3982.07,36.99 3982.07,3986.99
ADC_AVDD on Top Layer "ADC_AVDD_L01_P004" (solid, pour order 4): 1250.7,2575.46 1250.7,1700.46 2315.7,1700.46 2315.7,2575.46

## Keep-outs
Keep-Out Layer:
  lines w10: 0,250 ccw(c250,250) 250,0 3750,0 ccw(c3750,250) 4000,250 4000,3750 ccw(c3750,3750) 3750,4000 250,4000 ccw(c250,3750) 0,3750 ; 100,250 100,3750

## Silkscreen, mask and mechanical layers (free items; w line width, h text height)
Top Overlay:
  drawing of 59 lines, arcs and shapes, not listed
  text "BOOT" at 2420,3340 h30 r90
  text "RESET" at 1960,3320 h30 r90
  text "3V3" at 275,3230 h30
  text "D15" at 2800,3180 h30
  text "D22" at 275,3130 h30
  text "D14" at 2800,3080 h30
  text "D23" at 275,3030 h30
  text "D13" at 2800,2980 h30
  text "D24" at 275,2930 h30
  text "D12" at 2800,2880 h30
  text "D25" at 275,2830 h30
  text "D11" at 2800,2780 h30
  text "D26" at 275,2730 h30
  text "CAN Term. / Switch" at 965,2705 h30
  text "D10" at 2800,2680 h30
  text "D27" at 275,2630 h30
  text "D9" at 2800,2580 h30
  text "D32" at 275,2530 h30
  text "D8" at 2800,2480 h30
  text "D33" at 275,2430 h30
  text "D7" at 2800,2380 h30
  text "D34" at 275,2330 h30
  text "D6" at 2800,2280 h30
  text "D35" at 275,2230 h30
  text "D5" at 2800,2180 h30
  text "D36" at 275,2130 h30
  text "D4" at 2800,2080 h30
  text "D37" at 275,2030 h30
  text "D3" at 2800,1980 h30
  text "D38" at 275,1930 h30
  text "D2" at 2800,1880 h30
  text "D39" at 275,1830 h30
  text "D1" at 2800,1780 h30
  text "GND" at 275,1730 h30
  text "D0" at 2800,1680 h30
  text "A40" at 275,1340 h30
  text "A41" at 275,1240 h30
  text "A42" at 275,1140 h30
  text "A43" at 275,1040 h30
  text "A44" at 275,940 h30
  text "A45" at 275,840 h30
  text "A46" at 275,740 h30
  text "A47" at 275,640 h30